# Altium PCB 发射端v6.PcbDoc
Units mm, origin at the board's own origin, x right, y up, seen from the top; angles counter-clockwise.
Board outline 34.27 x 27.06 mm, 2 copper layers (Top Layer, Bottom Layer); 10 components, 34 nets, 101 pads, 32 vias.
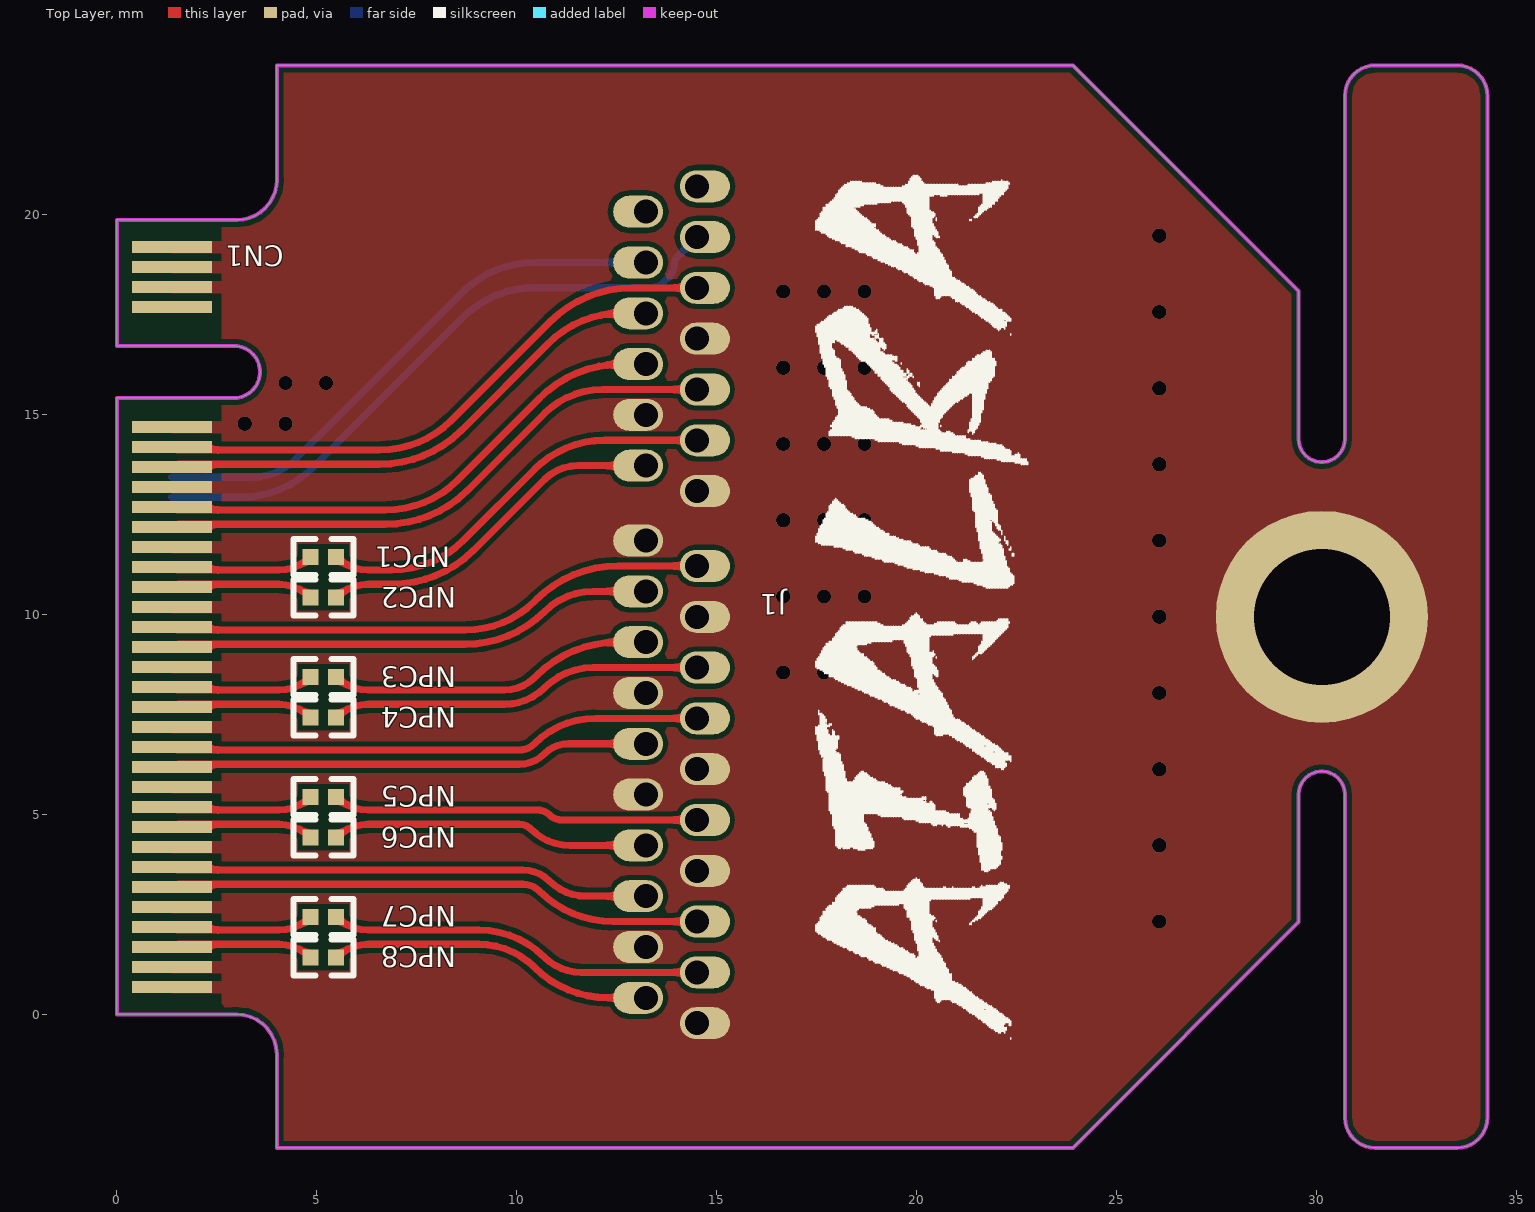
[diagram p0: Top Layer view]
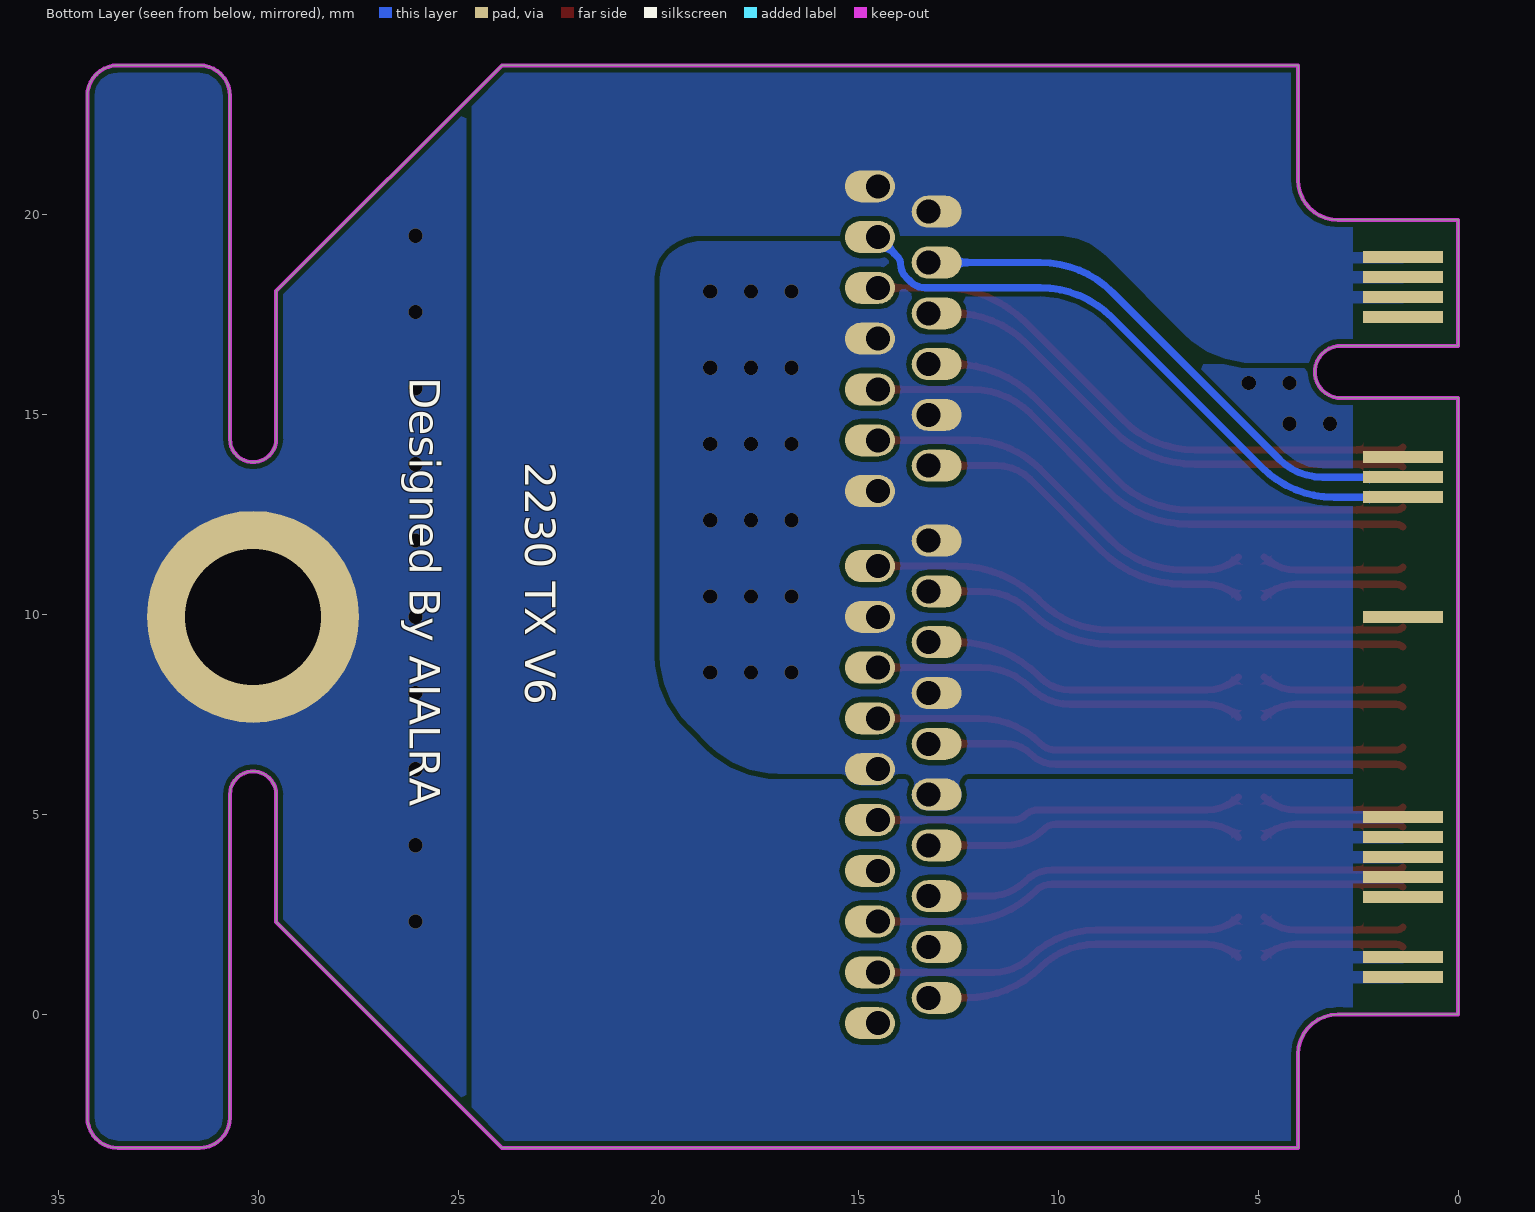
[diagram p1: Bottom Layer view, seen from below]

## Layer stack, top to bottom
Top Solder: solder mask 0.0102, Solder Resist, Dk 3.5
Top Layer: signal copper 0.0356
Dielectric 1: dielectric 0.32, FR-4, Dk 4.8
Bottom Layer: signal copper 0.0356
Bottom Solder: solder mask 0.0102, Solder Resist, Dk 3.5

## Board outline
0,0 3,0 cw(c3,-1) 4,-1 4,-3.338 23.902,-3.338 29.547,2.307 29.547,5.495 cw(c30.125,5.495) 30.703,5.495 30.703,-2.576 ccw(c31.465,-2.576) 31.465,-3.338 33.507,-3.338 ccw(c33.507,-2.576) 34.269,-2.576 34.269,22.964 ccw(c33.507,22.964) 33.507,23.726 31.465,23.726 ccw(c31.465,22.964) 30.703,22.964 30.703,14.385 cw(c30.125,14.385) 29.547,14.385 29.547,18.081 23.902,23.726 4,23.726 4,20.86 cw(c3,20.86) 3,19.86 0,19.86 0,16.71 2.9,16.71 cw(c2.931,16.06) 2.9,15.41 0,15.41

## Design rules (kind name [scope] priority, off if disabled: settings)
Clearance [All] p1: gap=0.127 ignorepadtopadclearanceinfootprint=FALSE except(0.025: Arc-Arc Arc-Track Arc-SMDPad Arc-THPad Arc-Via Arc-Text Arc-Hole Track-Track Track-SMDPad Track-THPad Track-Via Track-Text Track-Hole; 0.254: SMDPad-Via SMDPad-Text SMDPad-Hole THPad-Via THPad-Text THPad-Hole Via-Via Via-Text Via-Hole Text-Text Text-Hole)
DiffPairsRouting [All] p1: maxlimit=0.178 minlimit=0.178 mostfreqgap=0.178 toplayer_minwidth=0.178 toplayer_maxwidth=0.178 toplayer_prefwidth=0.178 bottomlayer_minwidth=0.178 bottomlayer_maxwidth=0.178 bottomlayer_prefwidth=0.178 maxuncoupledlength=12.7
HoleSize [All] p1: absolutevalues=TRUE maxlimit=3.81 minlimit=0.025 maxpercent=80.000 minpercent=20.000
MinimumSolderMaskSliver [All] p1: minsoldermaskwidth=0.025
PlaneClearance [All] p1: clearance=0.381
PolygonConnect [All] p1: connectstyle=Direct reliefconductorwidth=0.3 reliefentries=4 polygonreliefangle="90 Angle" airgapwidth=0.254
RoutingVias [All] p1: holewidth=0.711 width=1.27 viastyle="Through Hole" minholewidth=0.711 minwidth=1.27 maxholewidth=0.711 maxwidth=1.27
SilkToSilkClearance [All] p1: silktosilkclearance=0
SilkToSolderMaskClearance [IsPad] p1: minsilkscreentomaskgap=0.127 clearancetoexposedcopper=TRUE
SolderMaskExpansion [All] p1: expansion=0.102 istentingtop=FALSE
Width [All] p1: maxlimit=0.178 minlimit=0.178 preferedwidth=0.178
24 further rules are at their usual default settings.

## Classes and differential pairs
net class 锟斤拷锟斤拷锟皆拷锟酵紎KIND=1: a CN1 J1 NPC1 NPC2 NPC3 NPC4 NPC5 NPC6 NPC7 NPC8
differential pair PER3C: +PER3C_P -PER3C_N
differential pair PER2C: +PER2C_P -PER2C_N
differential pair PER1C: +PER1C_P -PER1C_N
differential pair PER0C: +PER0C_P -PER0C_N
differential pair REFCLK: +REFCLK_P -REFCLK_N
differential pair PET3: +PET3_P -PET3_N
differential pair PET2: +PET2_P -PET2_N
differential pair PET1: +PET1_P -PET1_N
differential pair PET0: +PET0_P -PET0_N
differential pair PER3: +PER3_P -PER3_N
differential pair PER2: +PER2_P -PER2_N
differential pair PER1: +PER1_P -PER1_N
differential pair PER0: +PER0_P -PER0_N

## Components (designator, comment, footprint, x,y, rotation, side; value= is the part's Value field where it differs from the comment)
CN1 "M.2 Socket 3 Key (M)" "M.2 Insert" 1.375,10.077 r0 top
J1 "Connector-33" b2b-hole 14.504,9.94 r270 top
NPC1 "220nF" 0201C 5.167,11.438 r0 top
NPC2 "220nF" 0201C 5.167,10.422 r0 top
NPC3 "220nF" 0201C 5.167,8.438 r0 top
NPC4 "220nF" 0201C 5.167,7.422 r0 top
NPC5 "220nF" 0201C 5.167,5.438 r0 top
NPC6 "220nF" 0201C 5.167,4.422 r0 top
NPC7 "220nF" 0201C 5.167,2.438 r0 top
NPC8 "220nF" 0201C 5.167,1.422 r0 top

## Footprints (in the part's own frame and the unit in brackets; to place one, negate y for a bottom-side part, rotate by r counter-clockwise, add the part's x,y. Pads: shape width x height; smd on the part's side, far side on the other; paste and mask are expansions set on the pad)
0201C [mm]
  rect 0.4x0.4 smd: 1(-0.32,0) 2(0.32,0)
  silkscreen extent -0.75,-0.45 0.75,0.45
b2b-hole [mm]
  oval 0.8x1.25 hole 0.6 copper offset 0,0.2: 1(-10.762,0) 3(-9.492,0) 5(-8.222,0) 7(-6.952,0) 9(-5.682,0) 11(-4.412,0) 13(-3.142,0) 15(-1.27,0) 17(0,0) 19(1.27,0) 21(2.54,0) 23(3.81,0) 25(5.08,0) 27(6.35,0) 29(7.62,0) 31(8.89,0) 33(10.16,0)
  oval 0.8x1.25 hole 0.6 copper offset 0,-0.2: 2(-10.127,-1.27) 4(-8.857,-1.27) 6(-7.587,-1.27) 8(-6.317,-1.27) 10(-5.047,-1.27) 12(-3.777,-1.27) 14(-1.905,-1.27) 16(-0.635,-1.27) 18(0.635,-1.27) 20(1.905,-1.27) 22(3.175,-1.27) 24(4.445,-1.27) 26(5.715,-1.27) 28(6.985,-1.27) 30(8.255,-1.27) 32(9.525,-1.27)
"M.2 Insert" [mm]
  rect 2x0.3 smd: 1(0,-9.397) 3(0,-8.897) 5(0,-8.397) 7(0,-7.897) 9(0,-7.397) 11(0,-6.897) 13(0,-6.397) 15(0,-5.897) 17(0,-5.397) 19(0,-4.897) 21(0,-4.397) 23(0,-3.897) 25(0,-3.397) 27(0,-2.897) 29(0,-2.397) 31(0,-1.897) 33(0,-1.397) 35(0,-0.897) 37(0,-0.397) 39(0,0.103) 41(0,0.603) 43(0,1.103) 45(0,1.603) 47(0,2.103) 49(0,2.603) 51(0,3.103) 53(0,3.603) 55(0,4.103) 57(0,4.603) 69(0,7.603) 71(0,8.103) 73(0,8.603) 75(0,9.103)
  rect 2x0.3 smd far side: 2(0,-9.149) 4(0,-8.649) 10(0,-7.149) 12(0,-6.649) 14(0,-6.149) 16(0,-5.649) 18(0,-5.149) 38(0,-0.149) 50(0,2.851) 52(0,3.351) 54(0,3.851) 68(0,7.351) 70(0,7.851) 72(0,8.351) 74(0,8.851)

## Part data
NPC1 NPC2 NPC3 NPC4 NPC5 NPC6 NPC7 NPC8: library part Nonp-Cap

## Free pads (board coordinates)
  round 1 on Top Solder: 1(10.186,20.212) 1(17.552,-0.364) 1(23.013,17.705)
  round 5.3 hole 3.4: ""(30.125,9.94)

## Via types
v1: diameter 0.356, hole 0.356, Top Layer to Bottom Layer, tented both sides, 32 vias

## Nets (pads, with @x,y where several pads share a name; then routed paths per layer and width w, separated by ;. In a path a pad name is that pad's centre, name@x,y a point inside that pad or via, vN(x,y) a via of type N, cw(c..) or ccw(c..) an arc to the next point about the centre after c; other vN are vias at no path point)
+3.3V: CN1.2 CN1.4 CN1.12 CN1.14 CN1.16 CN1.18 CN1.70 CN1.72 CN1.74 J1.1 J1.2
GND: CN1.1 CN1.3 CN1.9 CN1.15 CN1.21 CN1.27 CN1.33 CN1.39 CN1.45 CN1.51 CN1.57 CN1.71 CN1.73 CN1.75 J1.7 J1.10 J1.13 J1.14 J1.17 J1.20 J1.23 J1.24 J1.27 J1.30 J1.33 pad.
  other v1: 26.061,2.32 26.061,4.225 26.061,6.13 26.061,8.035 16.663,8.543 17.679,8.543 18.695,8.543 26.061,9.94 16.663,10.448 17.679,10.448 18.695,10.448 26.061,11.845 16.663,12.353 17.679,12.353 18.695,12.353 26.061,13.75 16.663,14.258 17.679,14.258 18.695,14.258 3.201,14.766 4.217,14.766 26.061,15.655 4.217,15.782 5.233,15.782 16.663,16.163 17.679,16.163 18.695,16.163 26.061,17.56 16.663,18.068 17.679,18.068 18.695,18.068 26.061,19.465
NetCN1_10: CN1.10
NetCN1_38: CN1.38
NetCN1_50: CN1.50 J1.3 | length 15.7
  Bottom Layer w0.178: CN1.50 3.105,12.928 ccw(c3.105,15.468) 4.901,13.672 8.65,17.422 cw(c10.447,15.625) 10.447,18.165 13.326,18.165 ccw(c13.326,18.672) 13.684,18.314 ; 13.684,18.314 13.8,18.43 ccw(c13.471,18.759) 13.937,18.759 cw(c14.192,18.759) 14.011,18.939 J1.3
NetCN1_52: CN1.52 J1.4 | length 13.9
  Bottom Layer w0.178: CN1.52 3.388,13.428 ccw(c3.388,14.961) 4.471,13.877 8.647,18.053 cw(c10.443,16.257) 10.443,18.797 J1.4
NetCN1_54: CN1.54
NetCN1_68: CN1.68
PER0_N: CN1.41 NPC2.1 | length 3.6
  Top Layer w0.178: CN1.41 cw(c1.549,10.506) 1.549,10.752 4.05,10.752 cw(c4.05,9.625) NPC2.1
PER0_P: CN1.43 NPC1.1 | length 3.6
  Top Layer w0.178: CN1.43 ccw(c1.549,11.354) 1.549,11.108 4.05,11.108 ccw(c4.05,12.235) NPC1.1
PER0C_N: J1.12 NPC2.2 | length 8.9
  Top Layer w0.178: NPC2.2 cw(c6.284,9.625) 6.284,10.752 6.873,10.752 ccw(c6.873,13.648) 8.92,11.6 10.692,13.372 cw(c11.525,12.538) 11.525,13.717 J1.12
PER0C_P: J1.11 NPC1.2 | length 10.2
  Top Layer w0.178: NPC1.2 ccw(c6.284,12.235) 6.284,11.108 6.873,11.108 ccw(c6.873,13.648) 8.669,11.852 10.44,13.623 cw(c12.2,11.863) 12.2,14.352 J1.11
PER1_N: CN1.29 NPC4.1 | length 3.6
  Top Layer w0.178: CN1.29 cw(c1.549,7.506) 1.549,7.752 4.05,7.752 cw(c4.05,6.625) NPC4.1
PER1_P: CN1.31 NPC3.1 | length 3.6
  Top Layer w0.178: CN1.31 ccw(c1.549,8.354) 1.549,8.108 4.05,8.108 ccw(c4.05,9.235) NPC3.1
PER1C_N: J1.19 NPC4.2 | length 9.4
  Top Layer w0.178: NPC4.2 cw(c6.284,6.625) 6.284,7.752 9.695,7.752 ccw(c9.695,9.161) 10.692,8.165 cw(c11.912,6.944) 11.912,8.67 J1.19
PER1C_P: J1.18 NPC3.2 | length 8.2
  Top Layer w0.178: NPC3.2 ccw(c6.284,9.235) 6.284,8.108 9.695,8.108 ccw(c9.695,9.161) 10.44,8.416 10.481,8.457 cw(c12.528,6.41) 12.528,9.305 J1.18
PER2_N: CN1.17 NPC6.1 | length 3.6
  Top Layer w0.178: CN1.17 cw(c1.549,4.506) 1.549,4.752 4.05,4.752 cw(c4.05,3.625) NPC6.1
PER2_P: CN1.19 NPC5.1 | length 3.6
  Top Layer w0.178: CN1.19 ccw(c1.549,5.354) 1.549,5.108 4.05,5.108 ccw(c4.05,6.235) NPC5.1
PER2C_N: J1.26 NPC6.2 | length 8
  Top Layer w0.178: NPC6.2 cw(c6.284,3.625) 6.284,4.752 10.059,4.752 cw(c10.059,4.332) 10.356,4.629 ccw(c11.331,5.604) 11.331,4.225 J1.26
PER2C_P: J1.25 NPC5.2 | length 9.2
  Top Layer w0.178: NPC5.2 ccw(c6.284,6.235) 6.284,5.108 10.521,5.108 cw(c10.521,4.687) 10.819,4.985 ccw(c11.119,5.285) 11.119,4.86 J1.25
PER3_N: CN1.5 NPC8.1 | length 3.6
  Top Layer w0.178: CN1.5 cw(c1.549,1.506) 1.549,1.752 4.05,1.752 cw(c4.05,0.625) NPC8.1
PER3_P: CN1.7 NPC7.1 | length 3.6
  Top Layer w0.178: CN1.7 ccw(c1.549,2.354) 1.549,2.108 4.05,2.108 ccw(c4.05,3.235) NPC7.1
PER3C_N: J1.32 NPC8.2 | length 8.2
  Top Layer w0.178: NPC8.2 cw(c6.284,0.625) 6.284,1.752 9.052,1.752 cw(c9.052,-0.211) 10.44,1.177 ccw(c12.28,3.017) 12.28,0.415 J1.32
PER3C_P: J1.31 NPC7.2 | length 9.4
  Top Layer w0.178: NPC7.2 ccw(c6.284,3.235) 6.284,2.108 9.052,2.108 cw(c9.052,-0.211) 10.692,1.429 ccw(c11.605,2.342) 11.605,1.05 J1.31
PET0_N: CN1.47 J1.9 | length 14.3
  Top Layer w0.178: CN1.47 cw(c1.549,12.006) 1.549,12.252 6.722,12.252 ccw(c6.722,15.148) 8.769,13.1 10.692,15.023 cw(c12.139,13.576) 12.139,15.622 J1.9
PET0_P: CN1.49 J1.8 | length 13.2
  Top Layer w0.178: CN1.49 ccw(c1.549,12.854) 1.549,12.608 6.722,12.608 ccw(c6.722,15.148) 8.518,13.352 10.575,15.409 cw(c12.622,13.362) 12.622,16.257 J1.8
PET1_N: CN1.35 J1.16 | length 12.2
  Top Layer w0.178: CN1.35 cw(c1.549,9.006) 1.549,9.252 8.718,9.252 ccw(c8.718,12.044) 10.692,10.07 cw(c11.912,8.849) 11.912,10.575 J1.16
PET1_P: CN1.37 J1.15 | length 13.6
  Top Layer w0.178: CN1.37 ccw(c1.549,9.854) 1.549,9.608 8.718,9.608 ccw(c8.718,12.044) 10.44,10.321 10.481,10.362 cw(c12.528,8.315) 12.528,11.21 J1.15
PET2_N: CN1.23 J1.22 | length 12
  Top Layer w0.178: CN1.23 cw(c1.549,6.006) 1.549,6.252 10.06,6.252 ccw(c10.06,7.145) 10.692,6.514 cw(c11.299,5.907) 11.299,6.765 J1.22
PET2_P: CN1.25 J1.21 | length 13.4
  Top Layer w0.178: CN1.25 ccw(c1.549,6.854) 1.549,6.608 10.06,6.608 ccw(c10.06,7.145) 10.44,6.765 cw(c11.973,5.232) 11.973,7.4 J1.21
PET3_N: CN1.11 J1.29 | length 13.4
  Top Layer w0.178: CN1.11 cw(c1.549,3.006) 1.549,3.252 10.157,3.252 cw(c10.157,2.672) 10.567,3.082 ccw(c12.407,4.922) 12.407,2.32 J1.29
PET3_P: CN1.13 J1.28 | length 12.1
  Top Layer w0.178: CN1.13 ccw(c1.549,3.854) 1.549,3.608 10.157,3.608 cw(c10.157,2.672) 10.819,3.334 ccw(c11.732,4.247) 11.732,2.955 J1.28
REFCLK_N: CN1.53 J1.6 | length 13.2
  Top Layer w0.178: CN1.53 cw(c1.549,13.506) 1.549,13.752 6.571,13.752 ccw(c6.571,16.648) 8.618,14.6 10.801,16.783 cw(c12.597,14.987) 12.597,17.527 J1.6
REFCLK_P: CN1.55 J1.5 | length 14.6
  Top Layer w0.178: CN1.55 ccw(c1.549,14.354) 1.549,14.108 6.571,14.108 ccw(c6.571,16.648) 8.367,14.852 10.829,17.314 cw(c12.876,15.267) 12.876,18.162 J1.5
pads on no net: CN1.69

## Polygon pours and split planes (outlines as drawn)
+3.3V on Bottom Layer "+3.3V_L02_P003" (solid, remove dead copper, pour order 3): 5.106,16.29 ccw(c5.106,18.743) 6.841,17.009 8.789,18.957 cw(c10.016,17.731) 10.016,19.465 18.933,19.465 cw(c18.933,18.219) 19.814,19.1 cw(c19.142,18.428) 20.092,18.428 20.092,8.96 cw(c17.552,8.96) 19.348,7.164 18.804,6.62 cw(c17.008,8.416) 17.008,5.876 -2.049,5.876 ccw(c-2.049,4.142) -3.276,5.368 -3.929,4.715 ccw(c-2.133,2.919) -4.673,2.919 -4.673,-2.343 ccw(c-2.133,-2.343) -3.929,-4.139 -3.004,-5.064 ccw(c-1.208,-3.268) -1.208,-5.808 22.208,-5.808 ccw(c22.208,-3.556) 23.8,-5.148 23.951,-4.997 ccw(c22.23,-3.276) 24.664,-3.276 24.664,22.858 ccw(c22.124,22.858) 23.92,24.654 23.806,24.768 ccw(c22.505,23.468) 22.505,25.307 -0.065,25.307 ccw(c-0.065,22.767) -1.861,24.563 -3.802,22.622 ccw(c-2.006,20.826) -4.546,20.826 -4.546,16.798 ccw(c-3.319,18.025) -3.319,16.29
GND on Bottom Layer "GND_L02_P008" (solid, remove dead copper, pour order 8): -4.673,16.798 4.689,16.798 ccw(c4.689,19.338) 6.485,17.542 8.045,19.102 cw(c9.841,17.306) 9.841,19.846 18.913,19.846 cw(c18.913,17.306) 20.709,19.102 20.854,18.957 20.854,9.087 cw(c18.314,9.087) 20.11,7.291 18.423,5.604 cw(c16.627,7.4) 16.627,4.86 -0.99,4.86 -4.691,8.561 cw(c-2.895,10.357) -5.435,10.357 -5.435,15.909 cw(c-5.128,15.909) -5.345,16.126
GND on Bottom Layer "GND_L02_P006" (solid, remove dead copper, pour order 6): 25.335,25.561 ccw(c25.335,23.021) 23.539,24.817 22.632,23.91 23.031,23.511 cw(c21.235,21.715) 23.775,21.715 23.775,-6.062 ccw(c24.082,-5.755) 24.082,-6.189 34.661,-6.189 ccw(c34.661,-3.649) 36.457,-5.445 39.523,-2.379 cw(c41.056,-0.846) 38.888,-0.846 38.888,22.132 36.203,24.817 ccw(c34.407,23.021) 34.407,25.561 27.458,25.561
GND on Top Layer "GND_L01_P004" (solid, remove dead copper, pour order 4): -0.609,24.926 -0.609,-3.359 ccw(c1.931,-3.359) 0.135,-5.155 2.203,-7.223 ccw(c3.999,-5.427) 3.999,-7.967 34.697,-7.967 40.176,-2.488 ccw(c38.38,-0.692) 40.92,-0.692 40.92,22.096 ccw(c38.38,22.096) 40.176,23.892 35.187,28.881 ccw(c33.391,27.085) 33.391,29.625 4.888,29.625 ccw(c4.888,27.085) 3.092,28.881 -0.736,25.053

## Keep-outs
Keep-Out Layer:
  the board outline again, w0.1

## Other copper
Top Layer:
  pour cut-out: 2.502,17.776 2.502,17.522 2.628,17.522 2.628,17.775
  pour cut-out: -0.736,14.838 2.628,14.838 2.629,14.839 2.629,16.261 2.439,16.451 -0.482,16.451 -0.736,16.197
  pour cut-out: -0.736,0.522 2.628,0.522 2.629,0.521 2.629,-0.901 2.439,-1.091 -0.482,-1.091 -0.736,-0.837
  pour cut-out: -0.736,17.522 2.628,17.522 2.629,17.521 2.629,16.099 2.439,15.909 -0.482,15.909 -0.736,16.163
  pour cut-out: -0.736,19.338 2.628,19.338 2.629,19.339 2.629,20.761 2.439,20.951 -0.482,20.951 -0.736,20.697
Bottom Layer:
  pour cut-out: 5.848,16.25 6.532,16.25 ccw(c6.532,16.388) 6.63,16.29 ccw(c6.35,16.57) 6.746,16.57 6.746,16.723
  pour cut-out: -0.736,22.353 2.629,22.353 2.629,19.051 -0.736,19.051
  pour cut-out: 2.352,14.004 2.352,13.648 2.629,13.648 2.629,14.004
  pour cut-out: 2.352,3.004 2.352,2.806 2.629,2.806 2.629,3.004
  pour cut-out: 2.312,17.524 2.312,17.306 2.629,17.306 2.629,17.524
  pour cut-out: -0.736,-0.403 2.629,-0.403 2.629,0.778 -0.736,0.778
  pour cut-out: -0.736,1.597 2.629,1.597 2.629,2.806 -0.736,2.806
  pour cut-out: -0.736,12.765 2.629,12.765 2.629,5.078 -0.736,5.078
  pour cut-out: -0.736,14.004 2.629,14.004 2.629,17.306 -0.736,17.306

## Silkscreen, mask and mechanical layers (free items; w line width, h text height)
Top Overlay:
  drawing of 1323 lines, arcs and shapes, not listed
Bottom Overlay:
  text "Designed By AIALRA" at 26.213,15.926 h0.76 r90
  text "2230 TX V6" at 23.318,13.801 h0.76 r90
Mechanical 1:
  the board outline again, w0.1